# Altium PCB 2021年平头哥运放.PcbDoc
Units mil, origin at the board's own origin, x right, y up, seen from the top; angles counter-clockwise.
Board outline 1875 x 1869.56 mil, 2 copper layers (Top Layer, Bottom Layer); 44 components, 31 nets, 108 pads, 10 vias.
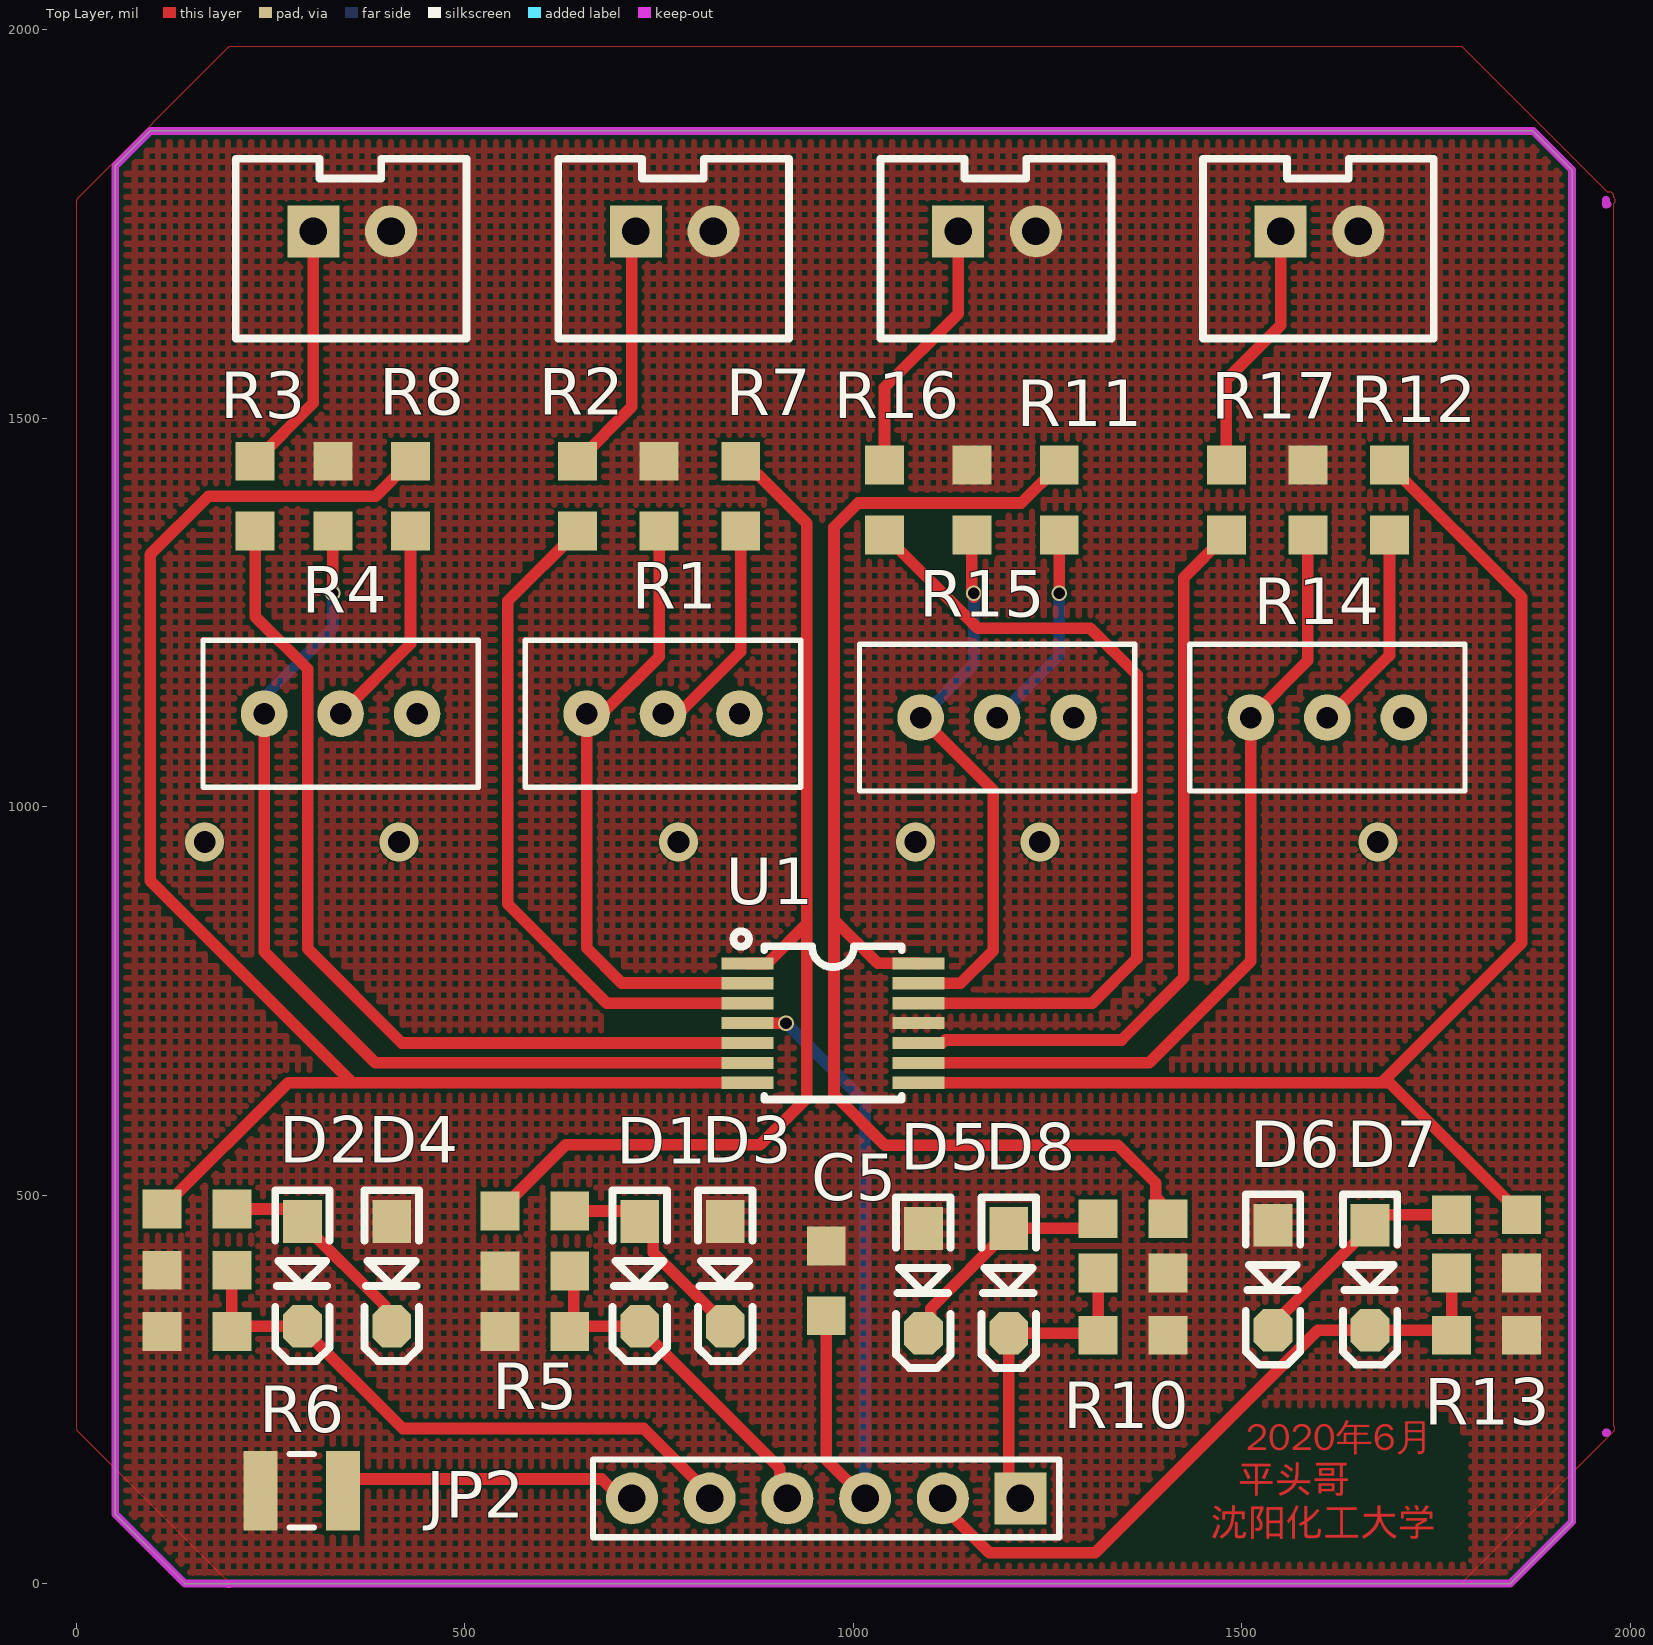
[diagram p0: Top Layer view]
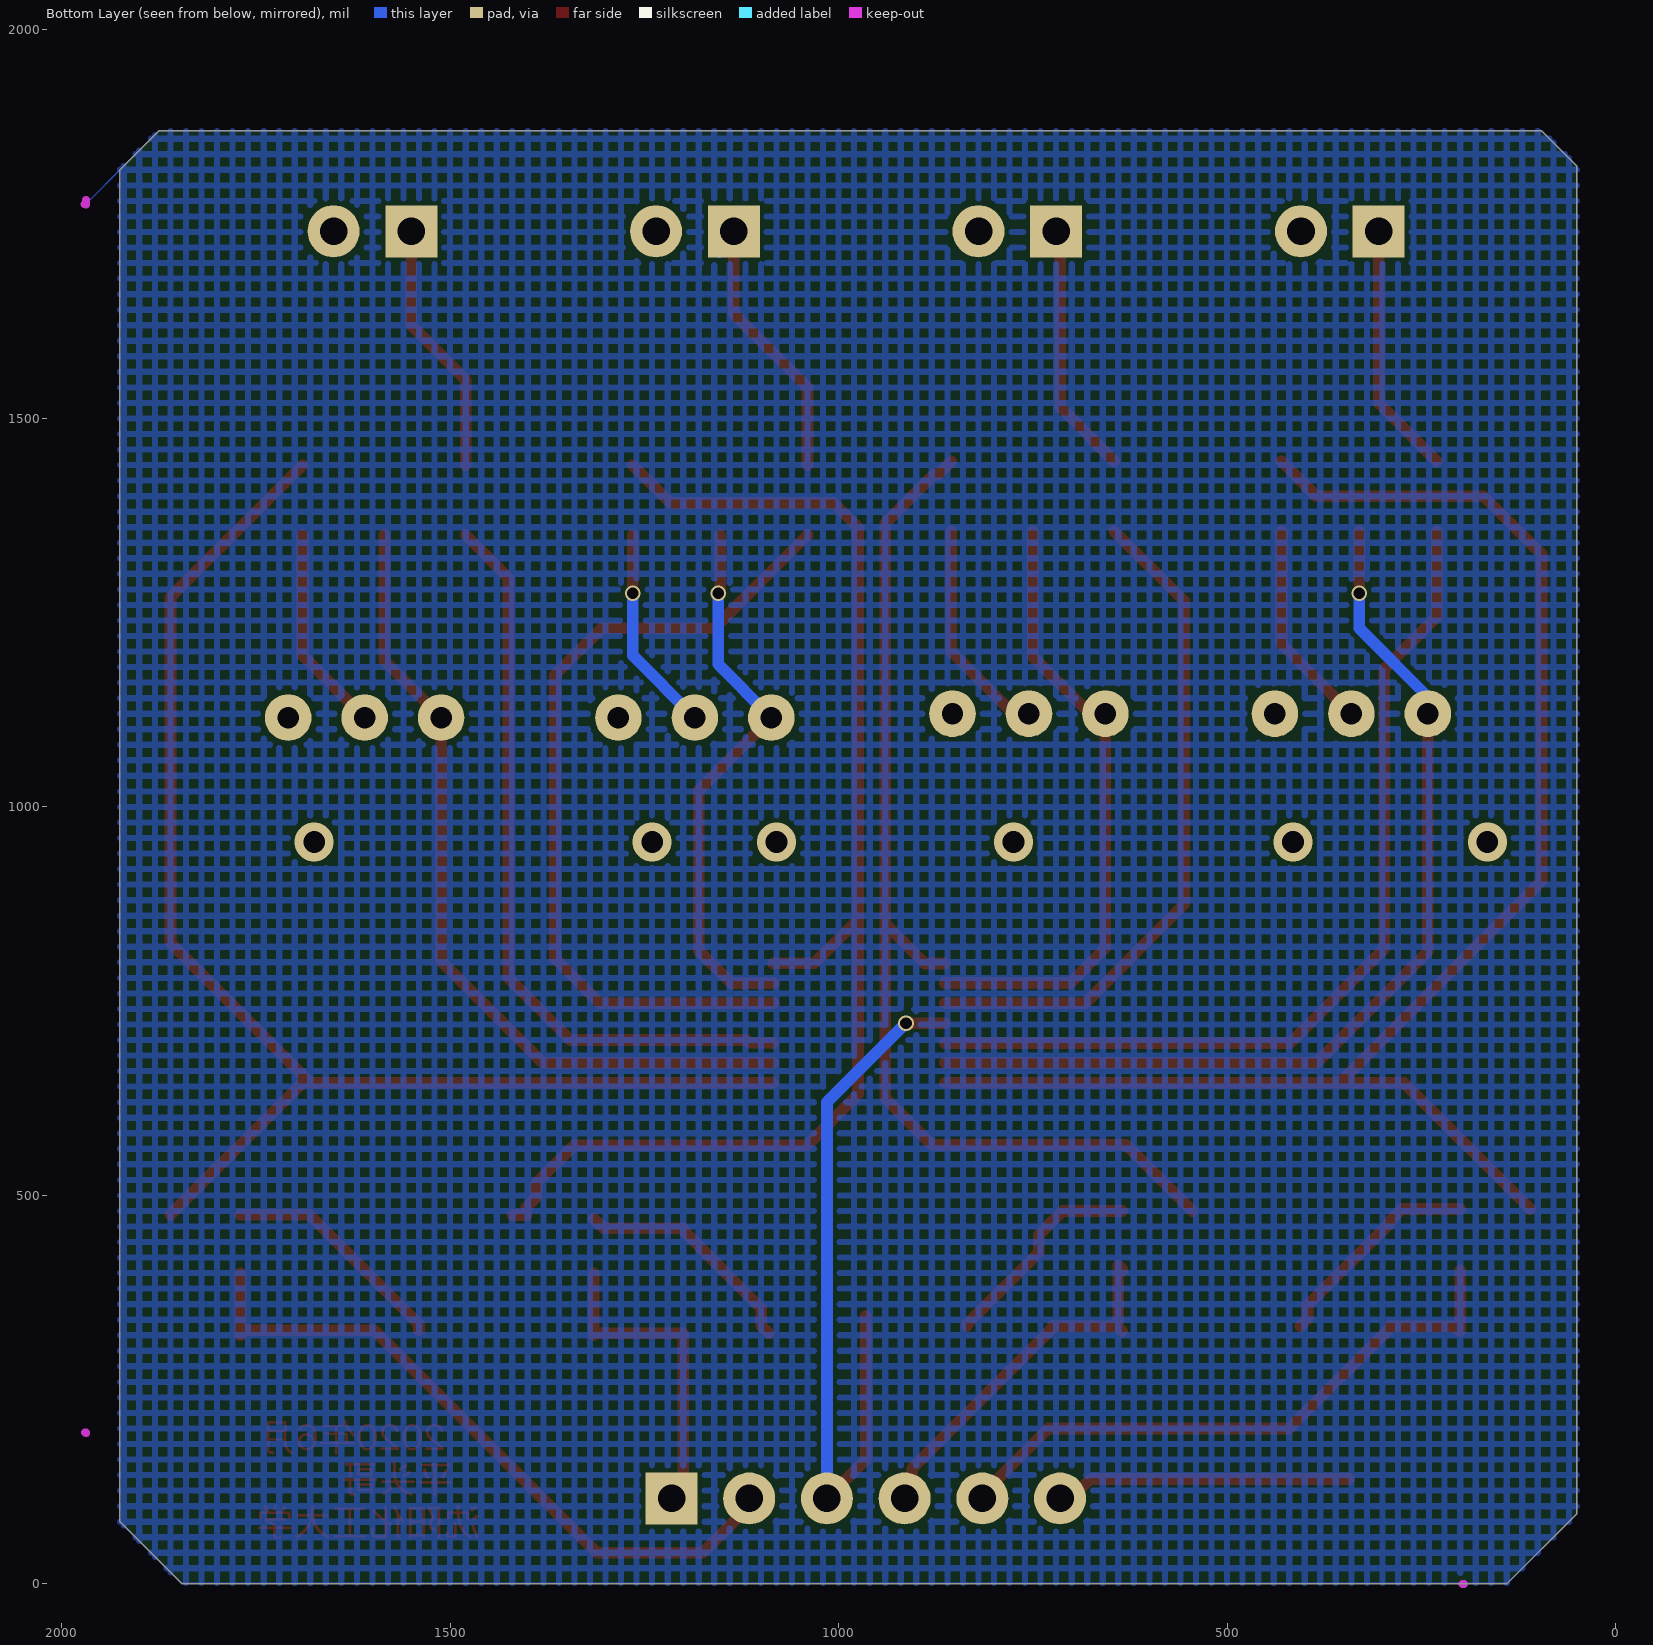
[diagram p1: Bottom Layer view, seen from below]

## Layer stack, top to bottom
Top Solder: solder mask 0.4, Solder Resist, Dk 3.5
Top Layer: signal copper 1.4
Dielectric 1: dielectric 12.6, FR-4, Dk 4.8
Bottom Layer: signal copper 1.4
Bottom Solder: solder mask 0.4, Solder Resist, Dk 3.5

## Board outline
50,90 50,1825 95,1870 1875,1870 1925,1820 1925,80 1845.44,0.44 139.56,0.44

## Design rules (kind name [scope] priority, off if disabled: settings)
Clearance [All] p1: gap=5 ignorepadtopadclearanceinfootprint=FALSE
HoleSize [All] p1: absolutevalues=TRUE maxlimit=500 minlimit=1 maxpercent=80.000 minpercent=20.000
HoleToHoleClearance [All] p1: gap=5 allowstackedmicrovias=TRUE
MinimumSolderMaskSliver [All] p1: minsoldermaskwidth=1
PolygonConnect [All] p1: connectstyle=Relief reliefconductorwidth=10 reliefentries=4 polygonreliefangle="90 Angle" airgapwidth=10
RoutingVias [All] p1: holewidth=28 width=15 viastyle="Through Hole" minholewidth=0 minwidth=0 maxholewidth=28 maxwidth=50
SilkToSilkClearance [All] p1: silktosilkclearance=0
SilkToSolderMaskClearance [IsPad] p1: minsilkscreentomaskgap=1 clearancetoexposedcopper=TRUE
SolderMaskExpansion [All] p1: expansion=4 istentingtop=FALSE
Width [All] p1: maxlimit=40 minlimit=15 preferedwidth=15 minimp=50.000000 maximp=50.000000 favimp=50.000000
25 further rules are at their usual default settings.

## Classes and differential pairs
component class Sheet3: C1 C3 C4 C5 C6 C7 C8 C9 D1 D2 D3 D4 D5 D6 D7 D8 JP2 R1 R2 R3 R4 R5 R6 R7 R8 R10 R11 R12 R13 R14 R15 R16 R17 RP1 U1

## Components (designator, comment, footprint, x,y, rotation, side; value= is the part's Value field where it differs from the comment)
C1 "104" "R 0805_M" 590,402.5 r0 top
C2 "104" "R 0805_M" 155,403.75 r0 top
C3 "104" "R 0805_M" 590,480 r0 top
C4 "104" "R 0805_M" 155,482.5 r180 top
C5 "104" "R 0805_M" 965,390 r90 top
C6 "104" "R 0805_M" 1815,475 r0 top
C7 "104" "R 0805_M" 1360,470 r180 top
C8 "104" "R 0805_M" 1360,400 r0 top
C9 "104" "R 0805_M" 1815,400 r0 top
D1 "IN5819" SOD-123 725,399 r270 top
D2 "IN5819" SOD-123 290.8,399 r270 top
D3 "IN5819" SOD-123 835,399 r270 top
D4 "IN5819" SOD-123 405.8,399 r270 top
D5 "IN5819" SOD-123 1090,390 r270 top
D6 "IN5819" SOD-123 1540,394 r270 top
D7 "IN5819" SOD-123 1665,394 r270 top
D8 "IN5819" SOD-123 1200,390 r270 top
JP1 "HDR-1X2" XH2.54-LI-2P 769.89,1740.95 r0 top
JP2 "HDR-1X6" HDR2.54-LI-6P 965,110 r180 top
JP3 "HDR-1X2" XH2.54-LI-2P 354.84,1740.95 r0 top
JP4 "HDR-1X2" XH2.54-LI-2P 1600,1740.95 r0 top
JP5 "HDR-1X2" XH2.54-LI-2P 1184.95,1740.95 r0 top
R1 "1K" "R 0805_M" 750,1400 r270 top
R2 "5.1K" "R 0805_M" 645,1400 r270 top
R3 "5.1K" "R 0805_M" 230,1400 r270 top
R4 "1K" "R 0805_M" 330,1400 r270 top
R5 "47K" "R 0805_M" 590,325 r0 top
R6 "47K" "R 0805_M" 155,325 r0 top
R7 "47K" "R 0805_M" 855,1400 r90 top
R8 "47K" "R 0805_M" 430,1400 r90 top
R9 "0" 14-1210 290,120 r180 top
R10 "47K" "R 0805_M" 1360,320 r0 top
R11 "47K" "R 0805_M" 1265,1395 r270 top
R12 "47K" "R 0805_M" 1690,1395 r270 top
R13 "47K" "R 0805_M" 1815,320 r0 top
R14 "1K" "R 0805_M" 1585,1395 r90 top
R15 "1K" "R 0805_M" 1152.5,1395 r90 top
R16 "5.1K" "R 0805_M" 1040,1395 r90 top
R17 "5.1K" "R 0805_M" 1480,1395 r90 top
RP1 "RP1" 3269W_滑动变阻器 755,1120 r180 top
RP2 "RP2" 3269W_滑动变阻器 340,1120 r0 top
RP3 "RP4" 3269W_滑动变阻器 1610,1115 r180 top
RP4 "RP3" 3269W_滑动变阻器 1185,1115 r0 top
U1 "OPA4377" PCBComponent_1 960,810 r270 top

## Footprints (in the part's own frame and the unit in brackets; to place one, negate y for a bottom-side part, rotate by r counter-clockwise, add the part's x,y. Pads: shape width x height; smd on the part's side, far side on the other; paste and mask are expansions set on the pad)
14-1210 [mm] "Chip Resistor, Body 3.2x2.5mm, IPC High Density"
  rect 1.1x2.6 smd: 1(-1.35,0) 2(1.35,0)
  silkscreen extent -0.4,-1.2 0.4,1.2, body extent -1.68,-1.32 1.68,1.32, height 0.9
3269W_滑动变阻器 [mil]
  round 60 hole 27.56: 1(98.43,0) 2(-98.43,0) 3(0,0)
  silkscreen extent -177,-94 177,94, body extent -173,-86 165,82, height 315
HDR2.54-LI-6P [mm] "排针，6脚"
  rect 1.7x1.7 hole 0.9: 1(-6.35,0)
  round 1.7 hole 0.9: 2(-3.81,0) 3(-1.27,0) 4(1.27,0) 5(3.81,0) 6(6.35,0)
  silkscreen extent -7.62,-1.27 7.62,1.27, body extent -7.62,-1.27 7.62,1.27, height 8.5
PCBComponent_1 [mm]
  rect 0.4x1.7 smd: 1(0.292,-2.452) 2(0.942,-2.452) 3(1.592,-2.452) 4(2.242,-2.452) 5(2.892,-2.452) 6(3.542,-2.452) 7(4.192,-2.452) 8(4.192,3.148) 9(3.542,3.148) 10(2.892,3.148) 11(2.242,3.148) 12(1.592,3.148) 13(0.942,3.148) 14(0.292,3.148)
  silkscreen extent -0.76,-2.91 4.74,2.6
"R 0805_M" [mil] "1/8W贴片电阻"
  rect 50x50 smd: 1(-45,0) 2(45,0)
  body extent -39,-25 39,25, height 20
SOD-123 [mil] "2.7x1.6X1.1mm（长宽高，不包括引脚）"
  rect 55x50 smd: 1(-67.5,0)
  oct 55x50 smd: 2(67.5,0)
  silkscreen extent -108,-35 112,35, body extent -73,-31 73,31, height 48
XH2.54-LI-2P [mm] "接插件，2P"
  rect 1.7x1.7 hole 0.9: 1(-1.27,0)
  round 1.7 hole 0.9: 2(1.27,0)
  silkscreen extent -3.81,-3.51 3.74,2.37, body extent -3.77,-3.3 3.77,2.4, height 7.05

## Part data
C1 C2 C3 C4 C5 C6 C7 C8 C9: library part C, "贴片电容", BOM名称=无极性贴片电容, 唯一出售店铺网址=https://shop463601444.taobao.com, 淘宝ID="封装库来自淘宝 ID：黄晶宝石", 联系售后，技术支持=https://shop463601444.taobao.com
JP1 JP3 JP4 JP5: library part "Header 2", "2P接插件", BOM名称=2P接插件, 版权归属="封装库来自淘宝 ID：黄晶宝石", 联系售后=https://shop463601444.taobao.com
JP2: library part "Header 6", "6P接插件", BOM名称=6P接插件, 学习资源=www.ooocke.com, 版权归属=源创客
R1: library part R1, "Resistor", LatestRevisionDate=17-Jul-2002, LatestRevisionNote="Re-released for DXP Platform.", PackageDescription="Axial Device, Thru-Hole; 2 Leads; 0.4 in Pin Spacing", PackageReference=AXIAL-0.4, Published=8-Jun-2000, Publisher="Altium Limited"
R2: library part R13, "Resistor", LatestRevisionDate=17-Jul-2002, LatestRevisionNote="Re-released for DXP Platform.", PackageDescription="Axial Device, Thru-Hole; 2 Leads; 0.4 in Pin Spacing", PackageReference=AXIAL-0.4, Published=8-Jun-2000, Publisher="Altium Limited"
R3: library part R14, "Resistor", LatestRevisionDate=17-Jul-2002, LatestRevisionNote="Re-released for DXP Platform.", PackageDescription="Axial Device, Thru-Hole; 2 Leads; 0.4 in Pin Spacing", PackageReference=AXIAL-0.4, Published=8-Jun-2000, Publisher="Altium Limited"
R4: library part R2, "Resistor", LatestRevisionDate=17-Jul-2002, LatestRevisionNote="Re-released for DXP Platform.", PackageDescription="Axial Device, Thru-Hole; 2 Leads; 0.4 in Pin Spacing", PackageReference=AXIAL-0.4, Published=8-Jun-2000, Publisher="Altium Limited"
R5: library part R9, "Resistor", LatestRevisionDate=17-Jul-2002, LatestRevisionNote="Re-released for DXP Platform.", PackageDescription="Axial Device, Thru-Hole; 2 Leads; 0.4 in Pin Spacing", PackageReference=AXIAL-0.4, Published=8-Jun-2000, Publisher="Altium Limited"
R6: library part R10, "Resistor", LatestRevisionDate=17-Jul-2002, LatestRevisionNote="Re-released for DXP Platform.", PackageDescription="Axial Device, Thru-Hole; 2 Leads; 0.4 in Pin Spacing", PackageReference=AXIAL-0.4, Published=8-Jun-2000, Publisher="Altium Limited"
R7: library part R5, "Resistor", LatestRevisionDate=17-Jul-2002, LatestRevisionNote="Re-released for DXP Platform.", PackageDescription="Axial Device, Thru-Hole; 2 Leads; 0.4 in Pin Spacing", PackageReference=AXIAL-0.4, Published=8-Jun-2000, Publisher="Altium Limited"
R8: library part R6, "Resistor", LatestRevisionDate=17-Jul-2002, LatestRevisionNote="Re-released for DXP Platform.", PackageDescription="Axial Device, Thru-Hole; 2 Leads; 0.4 in Pin Spacing", PackageReference=AXIAL-0.4, Published=8-Jun-2000, Publisher="Altium Limited"
R9: library part RES_MD
R10: library part R12, "Resistor", LatestRevisionDate=17-Jul-2002, LatestRevisionNote="Re-released for DXP Platform.", PackageDescription="Axial Device, Thru-Hole; 2 Leads; 0.4 in Pin Spacing", PackageReference=AXIAL-0.4, Published=8-Jun-2000, Publisher="Altium Limited"
R11: library part R8, "Resistor", LatestRevisionDate=17-Jul-2002, LatestRevisionNote="Re-released for DXP Platform.", PackageDescription="Axial Device, Thru-Hole; 2 Leads; 0.4 in Pin Spacing", PackageReference=AXIAL-0.4, Published=8-Jun-2000, Publisher="Altium Limited"
R12: library part R7, "Resistor", LatestRevisionDate=17-Jul-2002, LatestRevisionNote="Re-released for DXP Platform.", PackageDescription="Axial Device, Thru-Hole; 2 Leads; 0.4 in Pin Spacing", PackageReference=AXIAL-0.4, Published=8-Jun-2000, Publisher="Altium Limited"
R13: library part R11, "Resistor", LatestRevisionDate=17-Jul-2002, LatestRevisionNote="Re-released for DXP Platform.", PackageDescription="Axial Device, Thru-Hole; 2 Leads; 0.4 in Pin Spacing", PackageReference=AXIAL-0.4, Published=8-Jun-2000, Publisher="Altium Limited"
R14: library part R3, "Resistor", LatestRevisionDate=17-Jul-2002, LatestRevisionNote="Re-released for DXP Platform.", PackageDescription="Axial Device, Thru-Hole; 2 Leads; 0.4 in Pin Spacing", PackageReference=AXIAL-0.4, Published=8-Jun-2000, Publisher="Altium Limited"
R15: library part R4, "Resistor", LatestRevisionDate=17-Jul-2002, LatestRevisionNote="Re-released for DXP Platform.", PackageDescription="Axial Device, Thru-Hole; 2 Leads; 0.4 in Pin Spacing", PackageReference=AXIAL-0.4, Published=8-Jun-2000, Publisher="Altium Limited"
R16: library part R16, "Resistor", LatestRevisionDate=17-Jul-2002, LatestRevisionNote="Re-released for DXP Platform.", PackageDescription="Axial Device, Thru-Hole; 2 Leads; 0.4 in Pin Spacing", PackageReference=AXIAL-0.4, Published=8-Jun-2000, Publisher="Altium Limited"
R17: library part R15, "Resistor", LatestRevisionDate=17-Jul-2002, LatestRevisionNote="Re-released for DXP Platform.", PackageDescription="Axial Device, Thru-Hole; 2 Leads; 0.4 in Pin Spacing", PackageReference=AXIAL-0.4, Published=8-Jun-2000, Publisher="Altium Limited"
RP3: library part RP3
RP4: library part RP4

## Via types
v1: diameter 50, hole 28, Top Layer to Bottom Layer, 6 vias
v2: diameter 20, hole 15, Top Layer to Bottom Layer, 4 vias

## Nets (pads, with @x,y where several pads share a name; then routed paths per layer and width w, separated by ;. In a path a pad name is that pad's centre, name@x,y a point inside that pad or via, vN(x,y) a via of type N, cw(c..) or ccw(c..) an arc to the next point about the centre after c; other vN are vias at no path point)
AGND: C1.1 C2.1 C5.2 C8.2 C9.2 D3.1 D4.1 D5.1 D6.1 JP1.2 JP3.2 JP4.2 JP5.2 R1.1 R4.1 R5.1 R6.1 R9.2 R10.2 R13.2 R14.2 R15.2 U1.11
  other v1: 165,955 415,955 775,955 1080,955 1240,955 1675,955
GND: JP2.6 R9.1 | length 382.2
  Top Layer w15: R9.1@343.15,135 675.95,135 700.95,110 JP2.6
IN1: JP1.1 R2.1 | length 324.9
  Top Layer w15: R2.1 714.89,1514.89 JP1.1@714.89,1740.95
IN2: JP3.1 R3.1 | length 327
  Top Layer w15: R3.1 304.84,1519.84 JP3.1
IN3: JP4.1 R17.2 | length 329.9
  Top Layer w15: R17.2 1480,1550 1550,1620 JP4.1
IN4: JP5.1 R16.2 | length 349.1
  Top Layer w15: R16.2 1040,1540 1134.95,1634.95 JP5.1
  Bottom Layer w15: JP5.1@1153.78,1713.78 JP5.1@1160,1720
NetC3_1: C3.1 R7.2 U1.1 | length 1410.8
  Top Layer w15: C3.1 630,565 880,565 940,625 940,849.45 ; R7.2 872.5,1427.5 877.5,1427.5 940,1365 940,849.45 ; U1.1 889.05,798.5 940,849.45
NetC3_2: C3.2 D1.1 D3.2 | length 276.2
  Top Layer w15: C3.2 711.5,480 D1.1 742.5,449 742.5,426.5 835,334 D3.2
NetC4_1: C4.1 D2.1 D4.2 | length 280.1
  Top Layer w15: C4.1 274.8,482.5 D2.1 290.8,464 396.41,358.39 396.41,340.89 D4.2
NetC4_2: C4.2 R8.2 U1.7 | length 1993.2
  Top Layer w15: C4.2 272.46,644.96 355.04,644.96 ; R8.2 385,1400 170,1400 95,1325 95,905 355.04,644.96 ; U1.7 355.04,644.96
NetC6_1: C6.1 D6.2 D7.1 | length 295.9
  Top Layer w15: D6.2 1540,334 1681,475 C6.1
NetC6_2: C6.2 R12.1 U1.8 | length 1786.5
  Top Layer w15: U1.8 1679.96,644.96 ; R12.1 1860,1270 1860,825 1679.96,644.96 ; C6.2 1690.04,644.96 1679.96,644.96
NetC7_1: C7.1 R11.1 U1.14 | length 1701.6
  Top Layer w15: U1.14 1083.56,798.88 1031.12,798.88 975,855 ; R11.1 1216.25,1391.25 1006.25,1391.25 975,1360 975,855 ; C7.1@1401.76,474.83 C7.1@1420.17,474.83 ; C7.1@1401.76,484.83 1389.09,497.5 1389.09,515.91 1340.3,564.7 1040.3,564.7 975,630 975,855
NetC7_2: C7.2 D5.2 D8.1 | length 300.7
  Top Layer w15: D5.2 1099.39,331.89 1099.39,354.39 1200,455 D8.1 1302.5,457.5 C7.2
NetR1_2: R1.2 RP1.1 U1.2 | length 785.7
  Top Layer w15: RP1.1 656.57,818.43 701.72,773.28 863.09,773.28 U1.2 ; RP1.1@681.57,1125 750,1193.43 R1.2
NetR2_2: R2.2 U1.3 | length 878.6
  Top Layer w15: R2.2 555,1265 555,875 682.68,747.32 U1.3
NetR3_2: R3.2 U1.5 | length 1181.7
  Top Layer w15: R3.2 230,1245 297.5,1177.5 297.5,817.5 418.86,696.14 U1.5
NetR4_2: R4.2 RP2.2 U1.6 | length 1257
  Top Layer w15: RP2.2@235,1125 RP2.2@235,1135 ; RP2.2 241.57,813.43 384.45,670.55 U1.6 ; v2(330,1275) R4.2
  Bottom Layer w15: RP2.2@235,1135 330,1230 v2(330,1275)
NetR7_1: R7.1 RP1.3 | length 261.1
  Top Layer w15: RP1.3@780,1125 855,1200 R7.1
NetR8_1: R8.1 RP2.3 | length 272.3
  Top Layer w15: RP2.3 430,1210 R8.1
NetR11_2: R11.2 RP4.3 | length 268.1
  Top Layer w15: v2(1265,1275) R11.2
  Bottom Layer w15: RP4.3 1265,1195 v2(1265,1275)
NetR12_2: R12.2 RP3.3 | length 268.1
  Top Layer w15: RP3.3 1690,1195 R12.2
NetR14_1: R14.1 RP3.1 U1.9 | length 1060.7
  Top Layer w15: U1.9 1380.55,670.55 1511.57,801.57 RP3.1 1585,1188.43 R14.1
NetR15_1: R15.1 RP4.2 U1.13 | length 717.1
  Top Layer w15: U1.13@1083.56,773.28 U1.13 1137.91,772.91 1180,815 1180,1021.57 RP4.2 ; R15.1 1152.5,1273.85 1155,1271.35 v2@1155,1270
  Bottom Layer w15: RP4.2 1155,1183.43 v2@1155,1270
  other v2: 1155,1275
NetR16_1: R16.1 U1.12 | length 1070
  Top Layer w15: R16.1 1160,1230 1305,1230 1365,1170 1365,805 1307.32,747.32 U1.12 U1.12@1083.56,747.7
NetR17_1: R17.1 U1.10 | length 968.6
  Top Layer w15: U1.10 1084.31,696.51 1115.04,696.51 1118.53,700 1345,700 1425,780 1425,1295 R17.1
OUT1: C1.2 D1.2 JP2.4 R5.2 | length 482.5
  Top Layer w15: R5.2 R5.2@640,330 ; C1.2 635,405 640,410 R5.2@640,330 ; JP2.4 905.06,119.94 905.06,148.94 725,329 D1.2 641.5,331.5 R5.2@640,330
OUT2: C2.2 D2.2 JP2.5 R6.2 | length 791.1
  Top Layer w15: C2.2 R6.2 206.5,331.5 D2.2 290.8,329 419.8,200 730,200 JP2.5@817.5,112.5
OUT3: C9.1 D7.2 JP2.2 R13.1 | length 891.2
  Top Layer w15: JP2.2 1115,100 1175,40 1311.18,40 1597.68,326.5 D7.2 1763.5,326.5 R13.1 C9.1
OUT4: C8.1 D8.2 JP2.1 R10.1 | length 414.7
  Top Layer w15: JP2.1 1200,125 D8.2 1312.5,322.5 R10.1 C8.1
VCC: C5.1 JP2.3 U1.4 | length 961.5
  Top Layer w15: U1.4 v2(913.27,721.73) v2@915,720 ; C5.1 965,160 JP2.3
  Bottom Layer w15: v2@913.53,721.47 1015,620 JP2.3
pads on no net: RP1.2 RP2.1 RP3.2 RP4.1

## Polygon pours and split planes (outlines as drawn)
no net on Bottom Layer "NONET_L02_P007" (hatched 90Degree grid 20 track 8, remove dead copper, pour order 7): 50,1825 95,1870 1875,1870 1925,1820 1925,80 1846.07,1.07 138.93,1.07 50,90 50,1825
AGND on Bottom Layer "NONET_L02_P004" (solid, shelved, pour order 4): 95,1870 50,1825 50,90 138.93,1.07 1846.07,1.07 1925,80 1925,1820 1963.5,1781.5 1875,1870
AGND on Top Layer "AGND_L01_P006" (hatched 90Degree grid 15 track 8, remove dead copper, pour order 6): 139.56,0.44 50,90 50,1825 95,1870 1875,1870 1925,1820 1925,80 1845.44,0.44
AGND on Top Layer "NONET_L01_P005" (solid, shelved, pour order 5): 95,1870 50,1825 50,90 139.56,0.44 1845.44,0.44 1925,80 1925,1820 1875,1870
AGND on Top Layer "Top Layer-No Net" (solid, remove dead copper, shelved, pour order 2): 196.45,1.49 ccw(c200.02,5.01) 200.02,0 201.87,0 ccw(c201.87,5.01) 203.92,0.44 1780.02,0.44 ccw(c1780.02,5.45) 1783.58,1.92 1783.56,1.91 1977.07,195.41 1977.05,195.39 ccw(c1973.52,198.96) 1977.11,195.46 ccw(c1975.02,200.01) 1980.03,200.01 ccw(c1975.02,200.01) 1978.53,203.59 1978.53,1776.58 ccw(c1975.76,1780.76) 1980.78,1780.76 ccw(c1975.76,1780.76) 1978.53,1784.94 1978.53,1786.51 ccw(c1973.52,1786.51) 1971.18,1790.95 1785.06,1977.07 1785.07,1977.05 ccw(c1781.51,1973.52) 1781.51,1978.53 198.52,1978.53 ccw(c198.52,1973.52) 194.96,1977.05 194.97,1977.07 1.47,1783.56 1.5,1783.59 ccw(c5.01,1780.02) 0,1780.02 0,200.01 ccw(c5.02,200.01) 1.49,196.44 1.47,196.47

## Keep-outs
Top Layer:
  the board outline again, w10
Keep-Out Layer:
  lines w10: 195,0 196.85,0 ; 1968.5,193.94 1968.5,195 1970,195 ; 1968.5,1775.75 1970.75,1775.75 ; 1968.5,1776.5 1968.5,1775 1968.5,1781.5

## Other copper
Top Layer:
  pour cut-out: 415,680 390,680 260,810 290,810 415,685
  pour cut-out: 365,655 370,655 375,660 375,665 230,810 205,810 360,655
  pour cut-out: 1795,25 1795,185 1750,230 1513.92,230 1311.18,27.26
  pour cut-out: 1311.18,27.26 1313.43,25 1795,25
  pour cut-out: 1356.32,693.29 1356.32,687.16 1359.98,683.49 1359.98,683.29 1375.27,683.29 1460,768.02 1460,775 1442.74,775 1437.74,780
  pour cut-out: 710,735 710,710 825,710 825,734.58
  pour cut-out: 675,732.74 675,710 823.88,710 824.44,709.44 825,710 825,734.58 676.83,734.58
  pour cut-out: 677.8,735.55 678.77,734.58 825,734.58 825,708.88 823.88,710 675,710 675,732.74
  text "2020年6月" at 1504.94,160.44 h60
  text "平头哥" at 1495,105.44 h60
  text "沈阳化工大学" at 1460.06,50.22 h60